# Altium PCB Pump_shield.pcbdoc
Units mil, origin at the board's own origin, x right, y up, seen from the top; angles counter-clockwise.
Board outline 6300 x 3950 mil, 3 copper layers (Top Layer, Mid-Layer 1, Bottom Layer); 32 components, 23 nets, 98 pads, 0 vias.
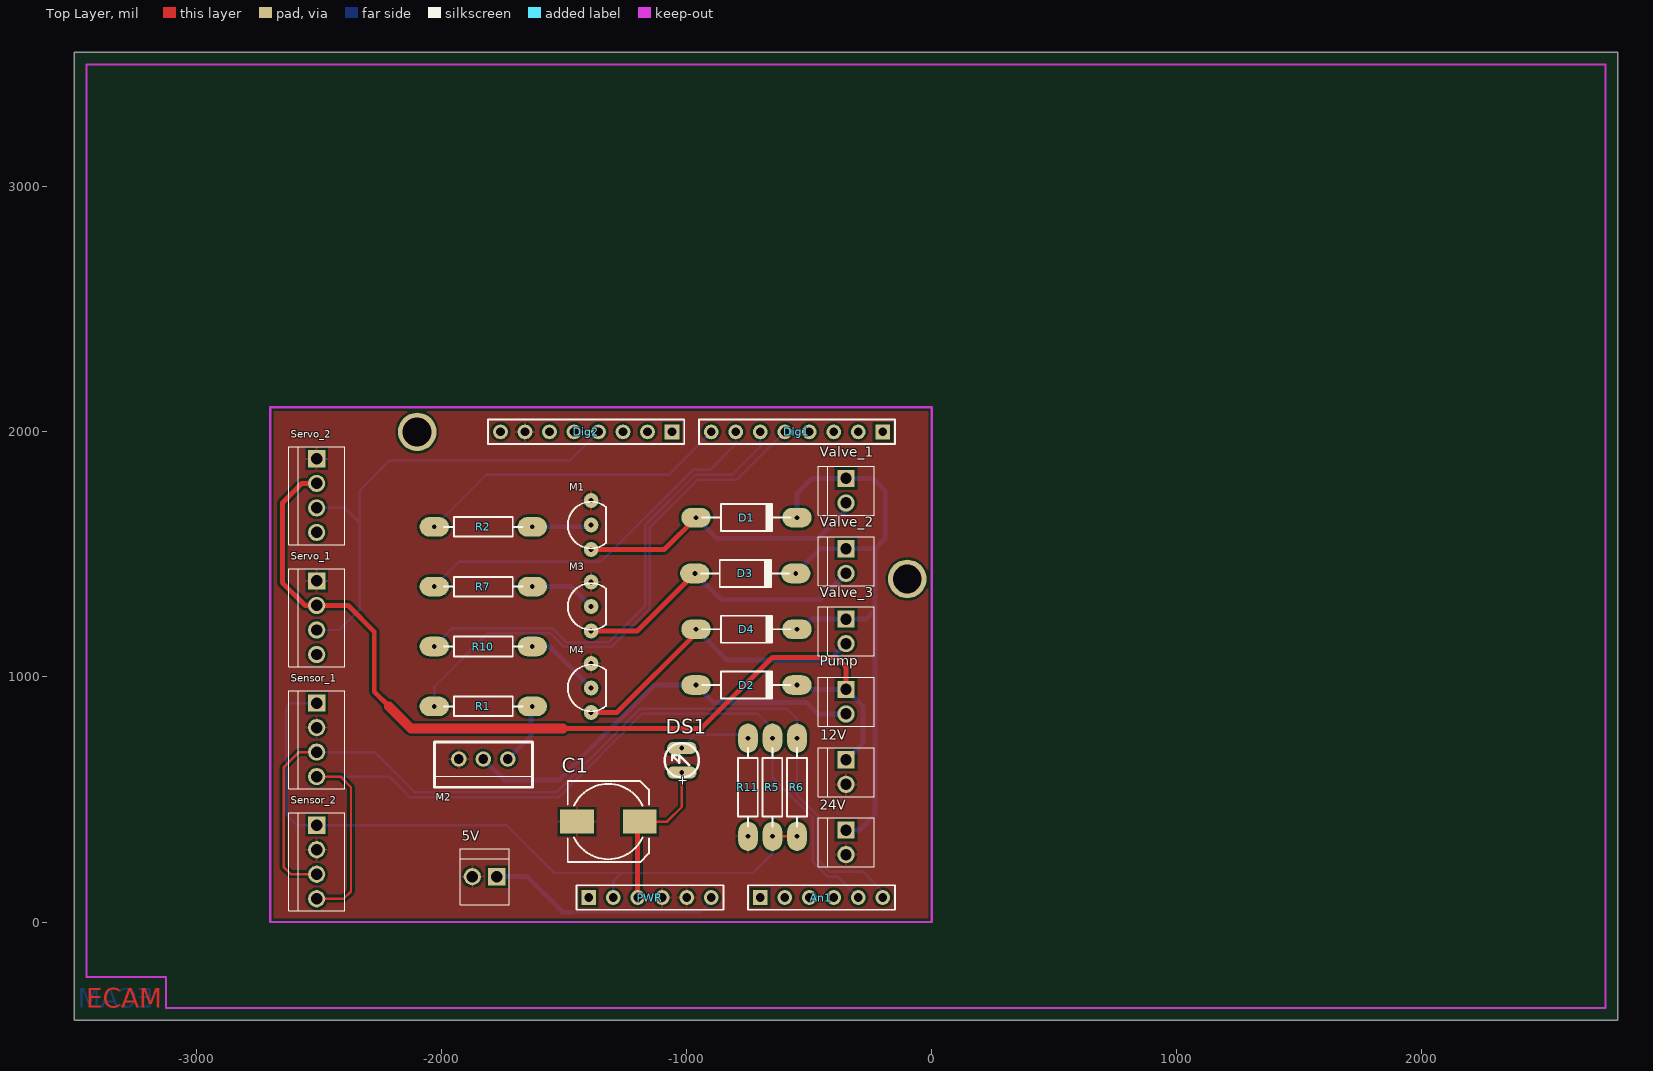
[diagram p0: Top Layer view]
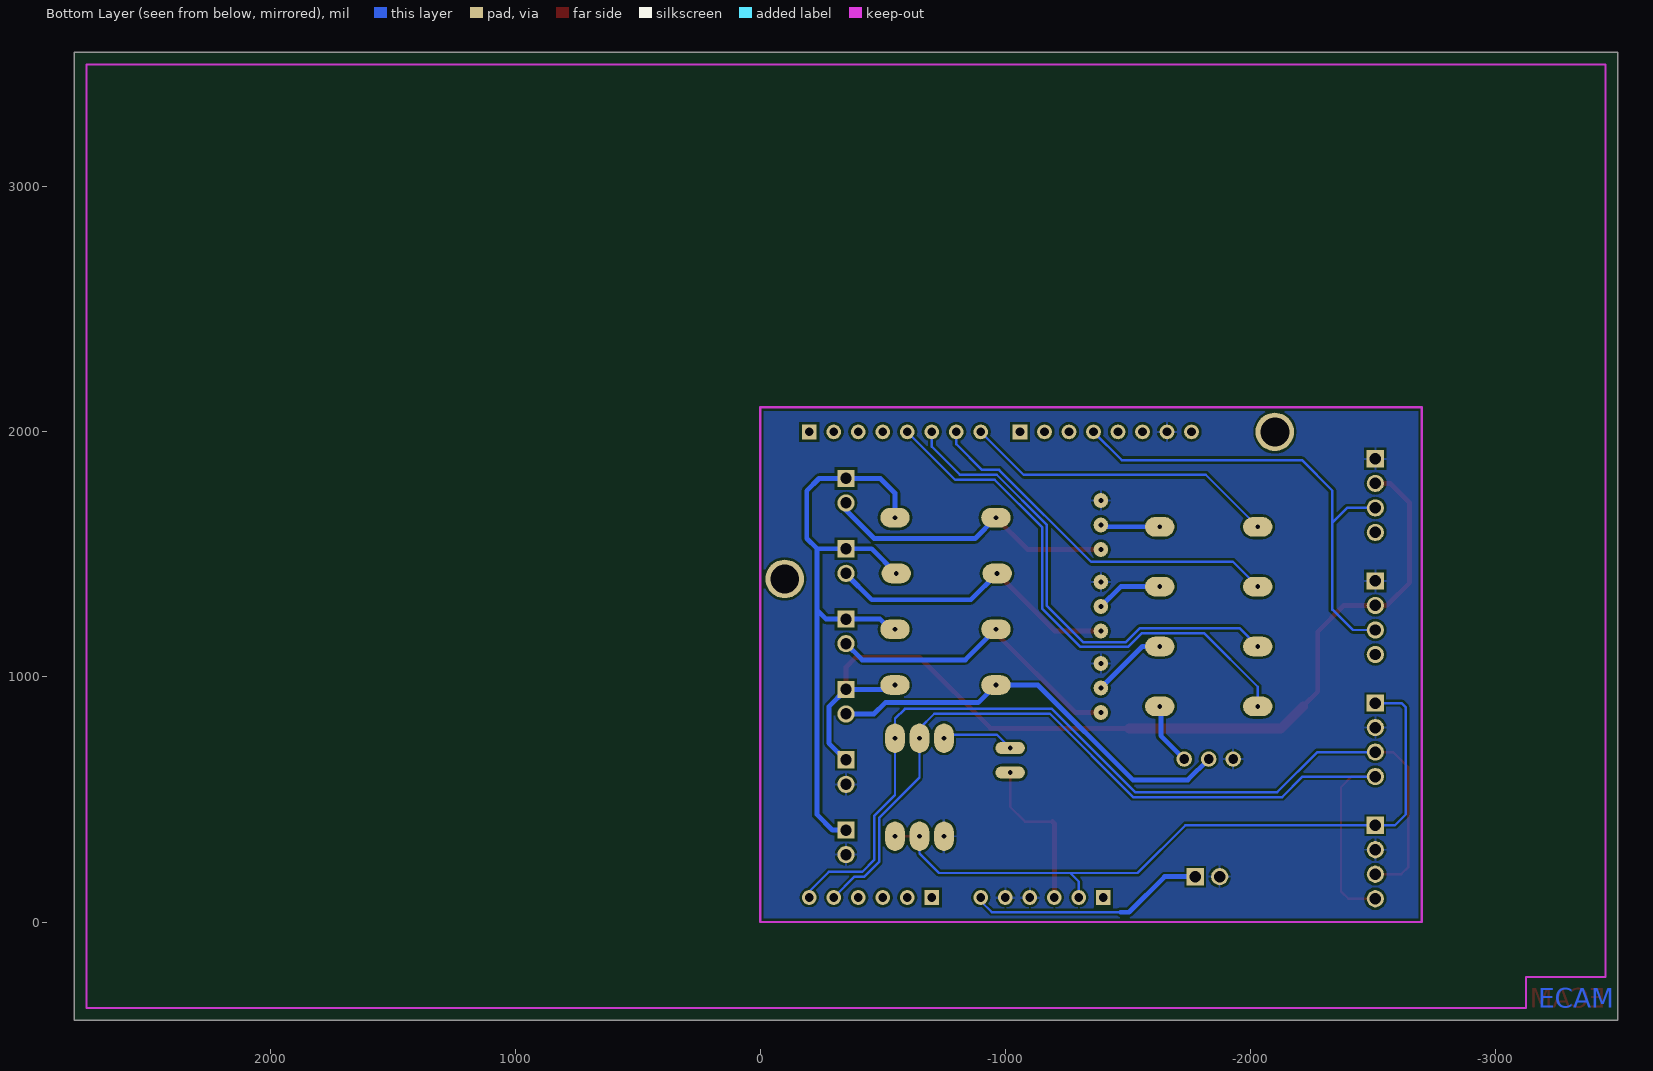
[diagram p1: Bottom Layer view, seen from below]

## Layer stack, top to bottom
Top Solder: solder mask 0.4, Solder Resist, Dk 3.5
Top Layer: signal copper 1.4
Dielectric1: core 12.6, FR-4, Dk 4.8
Mid-Layer 1: signal copper 1.4
Dielectric2: dielectric 12.6, FR-4, Dk 4.8
Bottom Layer: signal copper 1.4
Bottom Solder: solder mask 0.4, Solder Resist, Dk 3.5

## Board outline
-3500,-400 -3500,3550 2800,3550 2800,-400

## Design rules (kind name [scope] priority, off if disabled: settings)
Clearance "Clearance T DIP" [(IsTrack) vs (IsPad AND( HasFootprint('DIP*')))] p1: gap=10 ignorepadtopadclearanceinfootprint=FALSE
Clearance "Clearance PT" [(isTrack) vs (isPad)] p2: gap=10 ignorepadtopadclearanceinfootprint=FALSE
Clearance "Clearance TT" [(isTrack) vs (isTrack)] p3: gap=10 ignorepadtopadclearanceinfootprint=FALSE
Clearance "Clearance PP" [(IsPad) vs (IsPad)] p4: gap=10 ignorepadtopadclearanceinfootprint=FALSE
Clearance [All] p5: gap=10 ignorepadtopadclearanceinfootprint=FALSE
FabricationTestPointUsage TestPointUsage [All] p1: valid=0 allowmultiple=FALSE
FabricationTestpoint Testpoint [All] p1: side=3 testpointundercomponent=TRUE minsize=40 maxsize=100 preferedsize=60 minholesize=0 maxholesize=40 preferedholesize=32 testpointgrid=1 allowsidetop=TRUE allowsidebottom=TRUE usegrid=TRUE gridtolerance=0.01
HoleSize [All] p1: absolutevalues=TRUE maxlimit=248.03 minlimit=7.87 maxpercent=80.000 minpercent=20.000
PlaneClearance [All] p1: clearance=15
PlaneConnect [All] p1: planeconnectstyle=Relief reliefexpansion=10 reliefentries=4 reliefconductorwidth=10 reliefairgap=5
PolygonConnect [All] p1: connectstyle=Relief reliefconductorwidth=10 reliefentries=4 polygonreliefangle="90 Angle" airgapwidth=10
RoutingCorners [All] p1: cornerstyle=45-Degree minsetback=100 maxsetback=1000
RoutingLayers [All] p1: top layer_v5=TRUE mid layer 1_v5=FALSE bottom layer_v5=TRUE
RoutingVias "ECAM Vias" [All] p1: holewidth=19.68 width=80 viastyle="Through Hole" minholewidth=17.72 minwidth=60 maxholewidth=21.65 maxwidth=120
SolderMaskExpansion [All] p1: expansion=4
UnpouredPolygon [InNet('3V3')] p1:
Width Width_GND [InNet('GND')] p1: maxlimit=40 minlimit=10 preferedwidth=20
Width Width_VCC [InNet('VCC')] p2: maxlimit=40 minlimit=10 preferedwidth=20
Width [All] p3: maxlimit=40 minlimit=10 preferedwidth=20
22 further rules are at their usual default settings.

## Components (designator, comment, footprint, x,y, rotation, side; value= is the part's Value field where it differs from the comment)
5V "Connecteur 2" Header_2 -1925,184.21 r0 top
12V "Connecteur 2" Header_2 -349.21,512 r90 top
24V "Connecteur 2" Header_2 -349.21,225 r90 top
An1 "Header 6" HDR1X6 -700,100 r0 top
C1 "Cap_220u" CAPAE0810X700N -1320,410 r0 top value=220u
D1 "Diode" DIO10.46-5.3x2.8 -961.81,1650 r0 top
D2 "Diode" DIO10.46-5.3x2.8 -961.81,967.19 r0 top
D3 "Diode" DIO10.46-5.3x2.8 -966.81,1422.4 r0 top
D4 "Diode" DIO10.46-5.3x2.8 -961.81,1194.79 r0 top
Dig1 "Header 8" HDR1X8 -200,2000 r180 top
Dig2 "Header 8" HDR1X8 -1060,2000 r180 top
DS1 "LED" "LED 0.1" -1020,610 r90 top
M1 "MOSFET-N" TO-92bis_MOS-N -1390,1720 r0 top value=NMOS
M2 "MOSFET-N" TO-220_MOS-N -1730,665 r180 top value=NMOS
M3 "MOSFET-N" TO-92bis_MOS-N -1390,1387.5 r0 top value=NMOS
M4 "MOSFET-N" TO-92bis_MOS-N -1390,1055 r0 top value=NMOS
Pump "Connecteur 2" Header_2 -349.21,799 r90 top
PWR "Header 6" HDR1X6 -1400,100 r0 top
R1 "Résistance" AXIAL-0.4 -2030,880 r0 top
R2 "Résistance" AXIAL-0.4 -2030,1612.81 r0 top
R5 "Résistance" AXIAL-0.4 -650,750 r270 top
R6 "Résistance" AXIAL-0.4 -550,750 r270 top
R7 "Résistance" AXIAL-0.4 -2030,1368.54 r0 top
R10 "Résistance" AXIAL-0.4 -2030,1124.27 r0 top
R11 "Résistance" AXIAL-0.4 -750,350 r90 top
Sensor_1 "Header 4" Header_4 -2509.21,543.33 r90 top
Sensor_2 "Header 4" Header_4 -2509.21,45 r90 top
Servo_1 "Header 4" Header_4 -2509.21,1041.67 r90 top
Servo_2 "Header 4" Header_4 -2509.21,1540 r90 top
Valve_1 "Connecteur 2" Header_2 -349.21,1660 r90 top
Valve_2 "Connecteur 2" Header_2 -349.21,1373 r90 top
Valve_3 "Connecteur 2" Header_2 -349.21,1086 r90 top

## Footprints (in the part's own frame and the unit in brackets; to place one, negate y for a bottom-side part, rotate by r counter-clockwise, add the part's x,y. Pads: shape width x height; smd on the part's side, far side on the other; paste and mask are expansions set on the pad)
AXIAL-0.4 [mil] "Resistor; 2 Leads"
  oval 120x80 hole 19.68: 1(0,0) 2(400,0)
  silkscreen extent 40,-40 360,40
CAPAE0810X700N [mm]
  rect 3.5x2.5 smd: NEG(-3.25,0) POS(3.25,0)
  silkscreen extent -4.2,-4.2 4.2,4.2
DIO10.46-5.3x2.8 [mil] "Diode, Axial; Body 5.2 x 2.7 mm (LxDia. max), Lead Dia. 0.86 mm (max)"
  oval 120x80 hole 19.68: 1(0,0) 2(411.81,0)
  silkscreen extent 25,-55 385,55
HDR1X6 [mil] "Connector; Header; 6 Position"
  rect 60x60 hole 35.43: 1(0,0)
  round 60 hole 35.43: 2(100,0) 3(200,0) 4(300,0) 5(400,0) 6(500,0)
  silkscreen extent -50,-50 550,50
HDR1X8 [mil] "Connector; Header; 8 Position"
  rect 60x60 hole 35.43: 1(0,0)
  round 60 hole 35.43: 2(100,0) 3(200,0) 4(300,0) 5(400,0) 6(500,0) 7(600,0) 8(700,0)
  silkscreen extent -50,-50 750,50
Header_2 [mm]
  rect 1.785x1.785 hole 1.19: 1(3.81,0.02)
  round 1.785 hole 1.19: 2(1.27,0.02)
  silkscreen extent 0,-2.9 5.08,2.9
Header_4 [mm]
  rect 1.785x1.785 hole 1.19: 1(8.89,0.02)
  round 1.785 hole 1.19: 2(6.35,0.02) 3(3.81,0.02) 4(1.27,0.02)
  silkscreen extent 0,-2.9 10.16,2.9
"LED 0.1" [mil] "Led Verticale"
  oval 50x120 hole 19.68: 1(0,0) 2(100,0)
  silkscreen extent -20,-70 120,70
TO-92bis_MOS-N [mil] "TO, Flat Index; 3 In-Line, Axial Leads; Body Dia. 4.6mm; Leads 0.48 x 0.43 mm (max)"
  round 60 hole 19.68: D(0,-200) G(0,-100) S(0,0)
  silkscreen extent -95,-195 61,-5
TO-220_MOS-N [mm] "TO-220 Vertical"
  round 1.6 hole 1: D(2.54,0) G(0,0) S(5.08,0)
  silkscreen extent -2.54,-1.78 7.62,2.92

## Part data
5V 12V 24V Pump Valve_1 Valve_2 Valve_3: "Header 2", Designer="ECAM 2005", Supplier=ECAM, Type="Connecteur à vis"
An1 PWR: "Header, 6-Pin", LatestRevisionDate=17-Jul-2002, LatestRevisionNote="Re-released for DXP Platform.", Publisher="Altium Limited"
C1: "Condensateur polatisé", Designer="ECAM 2004", Supplier="RS 537-0641", Type="Condensateur polarisé debout"
Dig1 Dig2: "Header, 8-Pin", LatestRevisionDate=17-Jul-2002, LatestRevisionNote="Re-released for DXP Platform.", Publisher="Altium Limited"
DS1: Color=Rouge, Designer="ECAM 2004", Type=LED
M1 M2 M3 M4: "MOSFET", Designer="ECAM 2002", Type="Mosfet canal N"
R1 R2 R5 R6 R7 R10 R11: "Résistance standard", Designer="ECAM 2005", Type="Résistance standard"
Sensor_1 Sensor_2 Servo_1 Servo_2: "Header, 4-Pin", LatestRevisionDate=17-Jul-2002, LatestRevisionNote="Re-released for DXP Platform.", Publisher="Altium Limited", Supplier="Farnell 9731164"
D1 D2 D3 D4: Designer="ECAM 2003", Type="Diode standard"

## Free pads (board coordinates)
  round 157.48 hole 118.11: M(-2100,2000) M(-100,1400)

## Nets (pads, with @x,y where several pads share a name; then routed paths per layer and width w, separated by ;. In a path a pad name is that pad's centre, name@x,y a point inside that pad or via, vN(x,y) a via of type N, cw(c..) or ccw(c..) an arc to the next point about the centre after c; other vN are vias at no path point)
3V3: PWR.2 R5.2 R6.2 Sensor_1.1 Sensor_2.1 | length 2969.6
  Top Layer w10: R5.2 R6.2
  Bottom Layer w10: Sensor_1.1 -2616.67,893.33 -2635,875 -2635,440 -2590,395 Sensor_2.1 -1735,395 -1540,200 -1265,200 ; PWR.2 -1300,165 -1265,200 ; R5.2 -650,280 -730,200 -1265,200
+5: 5V.1 PWR.6 | length 968.7
  Bottom Layer w10: -1470,40 -945,40 -900,85 PWR.6
  Bottom Layer w20: 5V.1 -1650,185 -1505,40 -1470,40
+12: 12V.1 D2.2 Pump.1 Servo_1.2 Servo_2.2 | length 3969.5
  Top Layer w20: Servo_2.2 -2570,1790 -2650,1710 -2650,1385 -2556.67,1291.67 Servo_1.2 -2381.67,1291.67 -2275,1185 -2275,940 -2215,880 ; -1505,790 -940,790 -650,1080 -390,1080 -350,1040 Pump.1
  Top Layer w40: -2215,880 -2125,790 -1505,790
  Bottom Layer w20: D2.2 -531.81,949 Pump.1 -280,879 -280,730 -348,662 12V.1
+24: 24V.1 D1.2 D3.2 D4.2 Valve_1.1 Valve_2.1 Valve_3.1 | length 2704.1
  Bottom Layer w20: D3.2 -454.4,1523 Valve_2.1 -232,1523 ; D4.2 -530.21,1194.79 -489,1236 Valve_3.1 -269,1236 -232,1273 ; D1.2 -550,1750 -490,1810 Valve_1.1 -240,1810 -190,1760 -190,1565 -232,1523 ; 24V.1 -295,375 -232,438 -232,1273 ; -232,1273 -232,1523
GND: 5V.2 12V.2 24V.2 C1.NEG Dig2.7 M1.S M2.S M3.S M4.S PWR.4 PWR.5 R11.1 Sensor_1.2 Sensor_2.2 Servo_1.1 Servo_2.1
NetDS1_2: DS1.2 R11.2 | length 299
  Bottom Layer w10: DS1.2 -965,765 -765,765 R11.2
NetM1_G: M1.G R2.2 | length 243
  Bottom Layer w20: R2.2 -1397.19,1612.81 M1.G
NetM2_G: M2.G R1.2 | length 256.4
  Bottom Layer w20: M2.G -1635,760 -1635,875 R1.2
NetM3_G: M3.G R7.2 | length 273.6
  Bottom Layer w20: R7.2 -1471.04,1368.54 M3.G
NetM4_G: M4.G R10.2 | length 310.1
  Bottom Layer w20: R10.2 -1559.27,1124.27 M4.G
Pump: Dig1.5 R1.1 | length 2182.1
  Bottom Layer w10: R1.1 -2030,960 -1810.73,1179.27 -1557.55,1179.27 -1500.78,1122.5 -1307.5,1122.5 -1150,1280 -1150,1611.72 -956.72,1805 -795,1805 Dig1.5
RX_moteur: Dig2.3
SCL_Sensor: An1.6 R6.1 Sensor_1.3 Sensor_2.3 | length 3853.8
  Top Layer w10: Sensor_2.3 -2615,195 -2645,225 -2645,630 -2581.67,693.33 Sensor_1.3
  Bottom Layer w10: Sensor_1.3 -2273.33,693.33 -2110,530 -1530,530 -1190,870 -590,870 -550,830 R6.1 -550,518.28 -465,433.28 -465,253.28 -416.72,205 -280,205 -200,125 An1.6
SDA_Sensor: An1.5 R5.1 Sensor_1.4 Sensor_2.4 | length 3654
  Top Layer w10: Sensor_2.4 -2400,95 -2370,125 -2370,550 -2413.33,593.33 Sensor_1.4
  Bottom Layer w10: Sensor_1.4 -2213.33,593.33 -2130,510 -1521.72,510 -1181.72,850 -710,850 -650,790 R5.1 -650,590 -485,425 -485,245 -425,185 -385,185 An1.5
T_1: D1.1 M1.D Valve_1.2 | length 1206.7
  Top Layer w20: M1.D -1091.81,1520 D1.1
  Bottom Layer w20: D1.1 -876.81,1565 -465,1565 -350,1680 Valve_1.2
T_2: D3.1 M3.D Valve_2.2 | length 1228.3
  Top Layer w20: M3.D -1201.71,1187.5 D3.1
  Bottom Layer w20: D3.1 -859.41,1315 -455,1315 -350,1420 Valve_2.2
T_3: D4.1 M4.D Valve_3.2 | length 1269.5
  Top Layer w20: M4.D -1285,855 -961.81,1178.19 D4.1
  Bottom Layer w20: D4.1 -837.02,1070 -416,1070 Valve_3.2
T_4: D2.1 M2.D Pump.2 | length 1724.5
  Bottom Layer w20: M2.D -1745,580 -1520,580 -1132.81,967.19 D2.1 -889.62,895 -510,895 -464,849 Pump.2
TX_moteur: Dig2.4 Servo_1.3 Servo_2.3 | length 1968.8
  Bottom Layer w10: Servo_1.3 -2418.33,1191.67 -2335,1275 -2335,1630 ; Servo_2.3 -2395,1690 -2335,1630 ; Dig2.4 -1475,1885 -2210,1885 -2335,1760 -2335,1630
Val_1: Dig1.8 R2.1 | length 1290.4
  Bottom Layer w10: R2.1 -1817.81,1825 -1075,1825 Dig1.8
Val_2: Dig1.7 R7.1 | length 1520.8
  Bottom Layer w10: R7.1 -1928.54,1470 -1350,1470 -975,1845 -905,1845 -800,1950 Dig1.7
Val_3: Dig1.6 R10.1 | length 1968.2
  Bottom Layer w10: R10.1 -1955,1199.27 -1549.27,1199.27 -1492.5,1142.5 -1317.5,1142.5 -1170,1290 -1170,1620 -965,1825 -815,1825 -700,1940 Dig1.6
VCC: C1.POS DS1.1 PWR.3 | length 650.2
  Top Layer w10: C1.POS -1080,410 -1020,470 DS1.1
  Top Layer w20: PWR.3 -1200,402.05 C1.POS
pads on no net: An1.1 An1.2 An1.3 An1.4 Dig1.1 Dig1.2 Dig1.3 Dig1.4 Dig2.1 Dig2.2 Dig2.5 Dig2.6 Dig2.8 PWR.1 Servo_1.4 Servo_2.4

## Polygon pours and split planes (outlines as drawn)
GND on Top Layer (solid, remove dead copper, pour order 0): -2685,15 -2690,20 -2690,2090 -10,2090 -15,2085 -15,15
GND on Bottom Layer (solid, remove dead copper, pour order 2): -2685,15 -2685,2085 -15,2085 -15,15

## Keep-outs
Keep-Out Layer:
  lines w8: -3450,-225 -3125,-225 -3125,-350 2750,-350 2750,3500 -3450,3500 -3450,-225
  lines w10: -2700,0 0,0 0,200 0,1450 0,2100 -2700,2100 -2700,0

## Other copper
Top Layer:
  region net GND: -2600,-50
  text "ECAM" at -3450,-350 h78.74
  text ".GTL" at 4264,-1928 h90
Bottom Layer:
  text "ECAM" at -3175,-350 h78.74
  text ".GBL" at 4264,-1928 h90
Multi-Layer:

## Silkscreen, mask and mechanical layers (free items; w line width, h text height)
Top Overlay:
  text ".GTO" at 4264,-1928 h90
Top Paste:
  text ".GTP" at 4264,-1928 h90
Bottom Paste:
  text ".GBP" at 4264,-1928 h90
Top Solder:
  text ".GTS" at 4264,-1928 h90
Bottom Solder:
  text ".GBS" at 4264,-1928 h90
Mechanical 1:
  the board outline again, w7.87
Mechanical 16:
  circle w3.94: c3170,-1915 r55.12
  lines w5: -5675,-625 -5475,-625 ; -5675,1275 -5475,1275 ; -5675,3175 -5475,3175 ; -3195,-2525 -3195,-2325 ; -3195,4875 -3195,5075 ; -320,-2525 -320,-2325 ; -320,4875 -320,5075 ; 315,-2025 4815,-2025 ; 315,-1725 4815,-1725 ; 315,-1425 1815,-1425 ; 1815,-2325 1815,-1725 1815,-1125 ; 2555,-2525 2555,-2325 ; 2555,4875 2555,5075 ; 3915,-2325 3915,-1725 ; 4815,-635 5015,-635 ; 4815,1265 5015,1265 ; 4815,3165 5015,3165 ; 315,-2325 -1085,-2325 -1085,-1125 315,-1125 ; 315,-2325 4815,-2325 ; 315,-2325 315,-1125 ; 315,-1125 1815,-1125 ; 1815,-1125 4815,-1125 4815,-2325 ; 4815,-2325 4815,4875 -5475,4875 -5475,-2325 4815,-2325 ; -5675,-2525 -5675,5075 5015,5075 5015,-2525 -5675,-2525
  text "1" at -4643,4940 h70
  text "2" at -1783,4940 h70
  text "3" at 1097,4940 h70
  text "4" at 3967,4940 h70
  text "A" at -5600,4034 h70
  text "A" at 4890,4024 h70
  text "B" at -5600,2142 h70
  text "B" at 4890,2132 h70
  text "C" at -5600,232 h70
  text "C" at 4890,222 h70
  text "Concepteur du circuit :" at 365,-1225 h45
  text "TITRE :" at 1865,-1225 h45
  text "Stilmant.J" at 740,-1375 h80
  text "Shield Arduino for Festo" at 2125,-1495 h100
  text "Concepteur du PCB :" at 365,-1520 h45
  text "ECAM" at -850,-1535 h240
  text "D" at -5600,-1658 h70
  text "D" at 4890,-1668 h70
  text "Stilmant.J" at 735,-1680 h80
  text "Prom. de l'Alma 50" at -780,-1805 h60
  text "Date :" at 365,-1825 h45
  text "PART NO.:" at 1865,-1825 h45
  text "Layer :" at 3965,-1825 h45
  text ".Print_Date" at 755,-1860 h70
  text "1" at 1870,-1945 h60
  text "C" at 3145,-1945 h60
  text "ECAM" at 3251,-1960 h100
  text ".Print_Time" at 760,-1990 h70
  text "1200 Bruxelles" at -780,-2025 h60
  text "Nom du fichier :" at 365,-2125 h45
  text "DWG NO:" at 1865,-2125 h45
  text ".Print_Scale" at 4125,-2205 h40
  text ".Printout_Name" at 2015,-2240 h60
  text ".Pcb_File_Name_No_Path" at 415,-2245 h70
  text "1" at -4643,-2460 h70
  text "2" at -1783,-2460 h70
  text "3" at 1097,-2460 h70
  text "4" at 3967,-2460 h70

## Text inside footprints (layer, text, board x,y; h text height)
DS1: Top Overlay "+" at -1000,555 h39.37 r90